# EAGLE board 13539_Simultaneous_RFID_Tag_Reader_panel_v10 (EAGLE 7.5.0), part 1 of 2
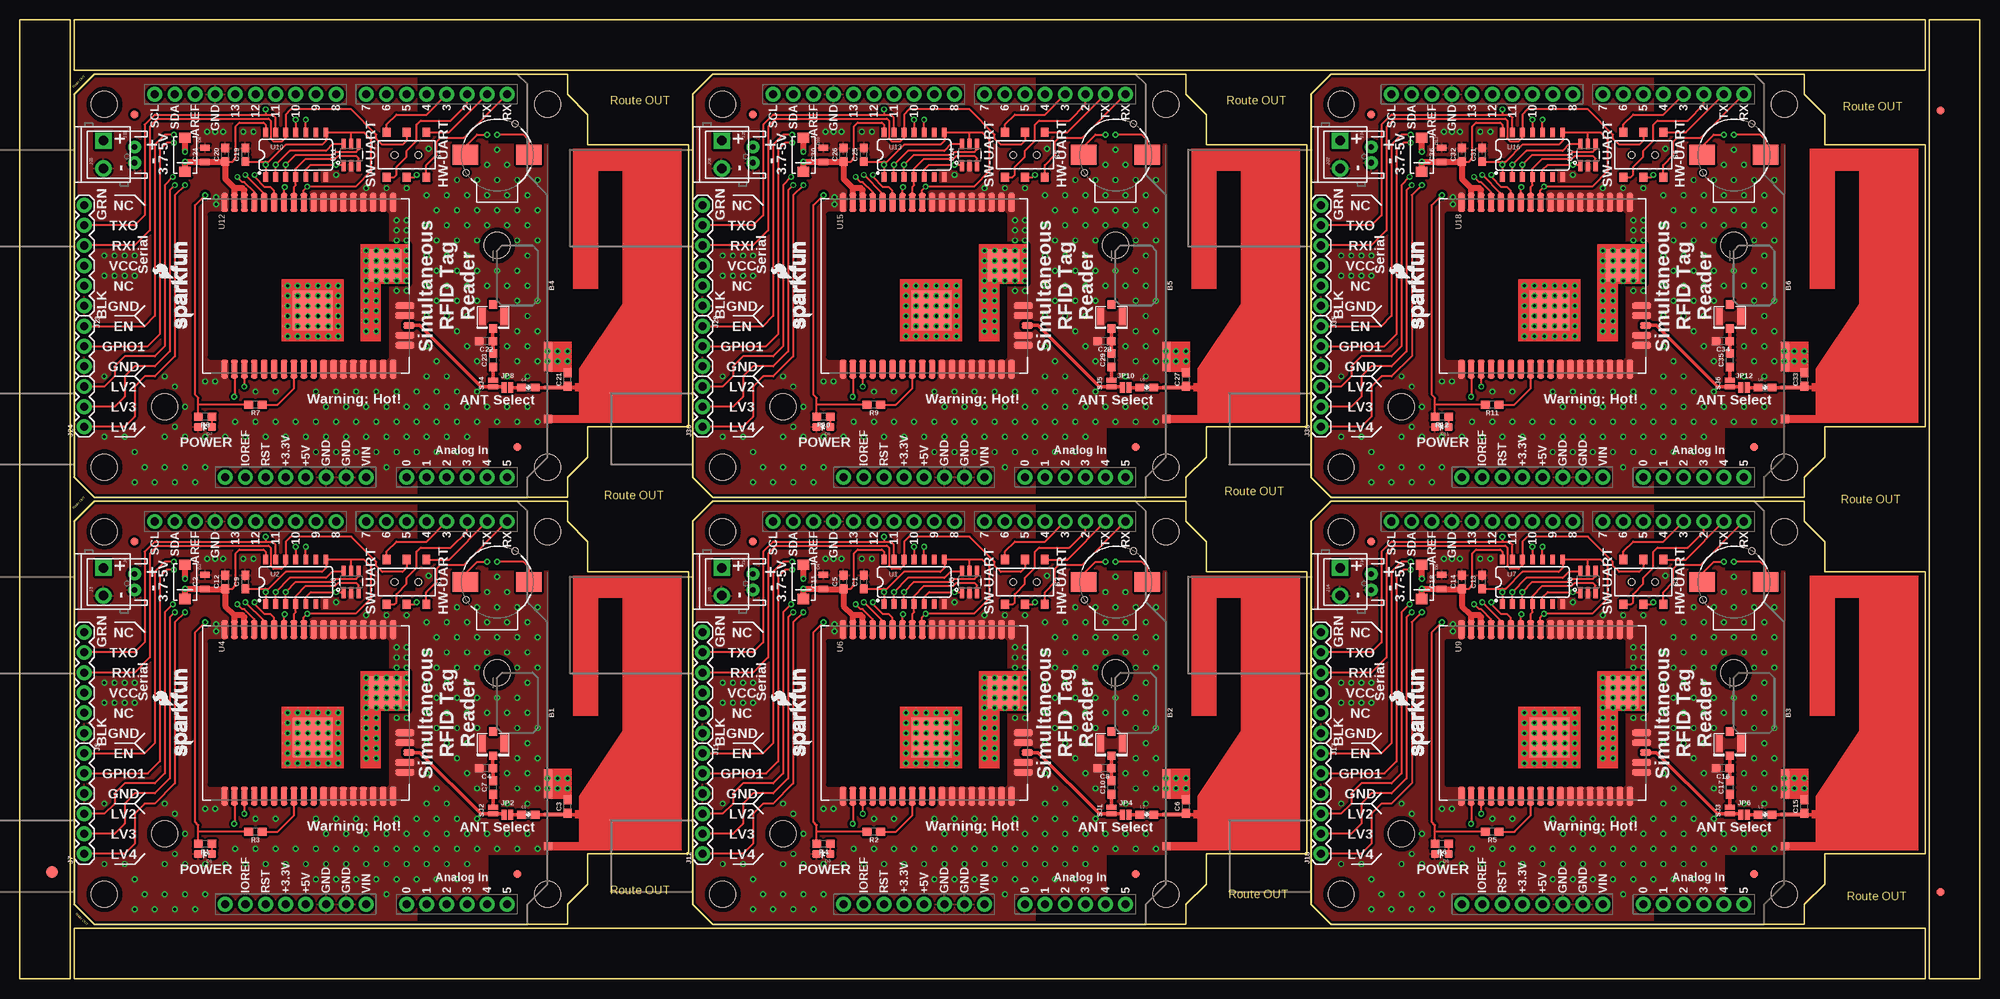
[diagram p0: board, top side]
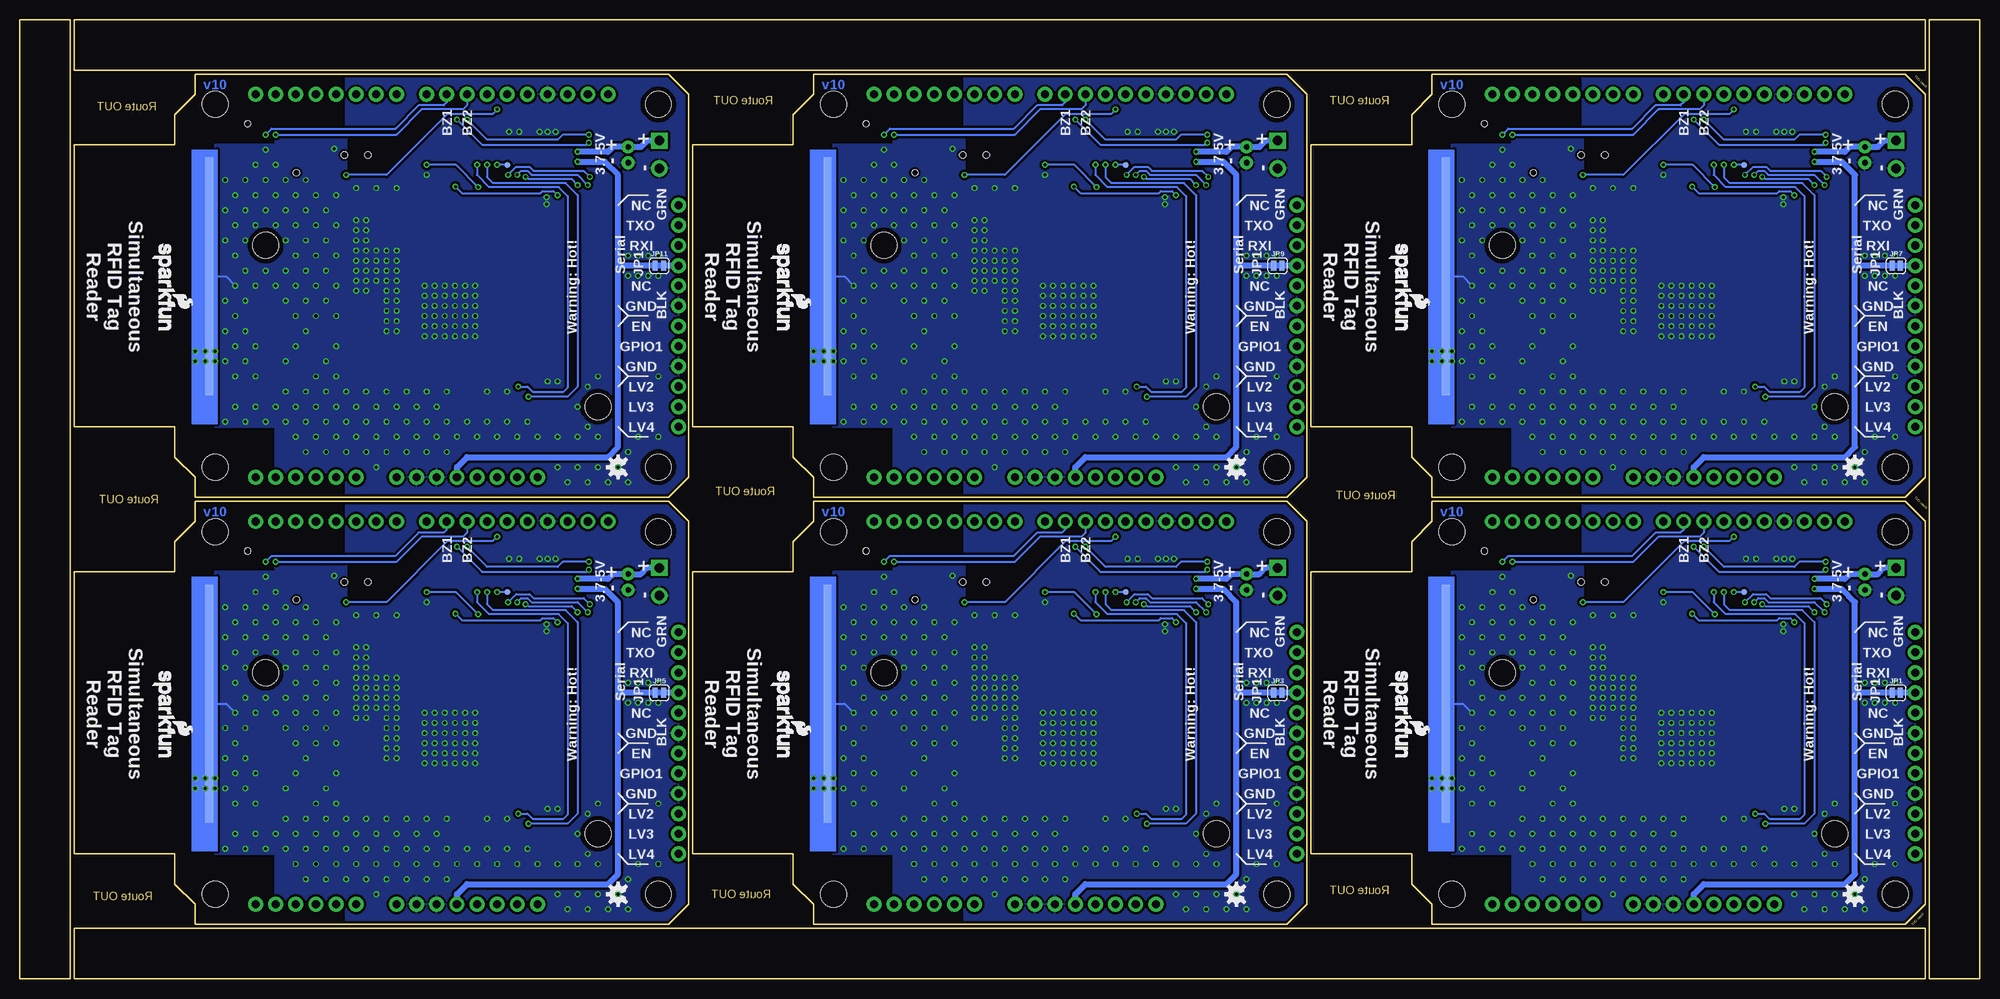
[diagram p1: board, bottom side, seen from below]

Size 247.14 x 120.9 mm. Coordinates in mm from the lower left corner, seen from the top.
Outline: 6.35,79.25 6.35,0 0,0 0,29.72
Outline: 0,27.18 0,120.9 6.35,120.9 6.35,76.71
Outline: 79.25,0 6.86,0 6.86,6.35 29.72,6.35
Outline: 27.18,6.35 240.28,6.35 240.28,0 76.71,0
Outline: 164.08,120.9 240.28,120.9 240.28,114.55 213.61,114.55
Outline: 216.15,114.55 6.86,114.55 6.86,120.9 166.62,120.9
Outline: 240.79,36.83 240.79,120.9 247.14,120.9 247.14,86.36
Outline: 247.14,88.9 247.14,0 240.79,0 240.79,39.37
Outline: 69.09,60.2 69.09,57.66 71.63,55.12 71.63,51.31 84.33,51.31 84.33,15.75 71.63,15.75 71.63,11.94 69.09,9.4 69.09,6.86 9.4,6.86 6.86,9.4 6.86,57.66 9.4,60.2 69.09,60.2
Outline: 147.07,60.2 147.07,57.66 149.61,55.12 149.61,51.31 162.31,51.31 162.31,15.75 149.61,15.75 149.61,11.94 147.07,9.4 147.07,6.86 87.38,6.86 84.84,9.4 84.84,57.66 87.38,60.2 147.07,60.2
Outline: 225.04,60.2 225.04,57.66 227.58,55.12 227.58,51.31 240.28,51.31 240.28,15.75 227.58,15.75 227.58,11.94 225.04,9.4 225.04,6.86 165.35,6.86 162.81,9.4 162.81,57.66 165.35,60.2 225.04,60.2
Outline: 69.09,114.05 69.09,111.51 71.63,108.97 71.63,105.16 84.33,105.16 84.33,69.6 71.63,69.6 71.63,65.79 69.09,63.25 69.09,60.71 9.4,60.71 6.86,63.25 6.86,111.51 9.4,114.05 69.09,114.05
Outline: 147.07,114.05 147.07,111.51 149.61,108.97 149.61,105.16 162.31,105.16 162.31,69.6 149.61,69.6 149.61,65.79 147.07,63.25 147.07,60.71 87.38,60.71 84.84,63.25 84.84,111.51 87.38,114.05 147.07,114.05
Outline: 225.04,114.05 225.04,111.51 227.58,108.97 227.58,105.16 240.28,105.16 240.28,69.6 227.58,69.6 227.58,65.79 225.04,63.25 225.04,60.71 165.35,60.71 162.81,63.25 162.81,111.51 165.35,114.05 225.04,114.05
Copper layers (1*16): Top 0.035mm / dielectric 1.5mm / Bottom 0.035mm
Design rules "SparkFun-2-layer-TIGHT": minimum track width 7mil, minimum drill 15mil, track to track 7mil, track to pad 7mil, pad to pad 7mil, via to via 7mil, smd to smd 7mil, copper to edge 7mil, drill to drill 7mil, minimum pad ring 7mil, minimum via ring 7mil, stop-mask expansion 4mil, vias tented up to drill 20mil, thermal gap 10mil
Net classes: 1 power: width 0.203 mm

## Footprints (pad centres in the part's own frame; a part is rotated, then mirrored left to right if it is on the bottom)
UNO_R3_SHIELD = drill 1.016 pad 1.88: 3.3V 24.13,-2.54; 5V 24.13,0; A0 24.13,12.7; A1 24.13,15.24; A2 24.13,17.78; A3 24.13,20.32; A4 24.13,22.86; A5 24.13,25.4; AREF -24.13,-13.97; D2 -24.13,20.32; D3 -24.13,17.78; D4 -24.13,15.24; D5 -24.13,12.7; D6 -24.13,10.16; D7 -24.13,7.62; D8 -24.13,3.81; D9 -24.13,1.27; D10 -24.13,-1.27; D11 -24.13,-3.81; D12 -24.13,-6.35; D13 -24.13,-8.89; GND@0 24.13,2.54; GND@1 24.13,5.08; GND@2 -24.13,-11.43; IOREF 24.13,-7.62; NC 24.13,-10.16; RES 24.13,-5.08; RX -24.13,25.4; SCL -24.13,-19.05; SDA -24.13,-16.51; TX -24.13,22.86; VIN 24.13,7.62
0603 = smd 1.1 x 1: 1 -0.85,0; 2 0.85,0
0805 = smd 0.8 x 1.2: 1 -0.9,0; 2 0.9,0
LED-0603 = smd 1 x 1: A 0,-0.877; C 0,0.877
SMA-DIODE = smd 1.27 x 1.47: A -2.15,0; C 2.15,0
915MHZ_ANTENNA_TRIMBLE = smd 0.44 x 3: ANT -0.006,-1.315 | smd 1.02 x 1: GND@1 -3.966,-0.315 | smd 3.677 x 1: GND@2 3.909,-0.315 | smd 30 x 1 bottom: GND@3 14,-1
FIDUCIAL-1.5X3 = smd 1.5 x 1.5: 1 0,0
FIDUCIAL-1X2 = smd 1 x 1: 1 0,0
1X06 = drill 1.016 pad 1.88: 1 0,0; 2 2.54,0; 3 5.08,0; 4 7.62,0; 5 10.16,0; 6 12.7,0
JST-2-PTH = drill 0.7 pad 1.6: 1 -1,0; 2 1,0
U.FL = smd 2.2 x 0.85: P$1 0,1.375; P$2 0,-1.375 | smd 1.05 x 1: P$3 1.525,0; P$4 -1.525,0
1X03 = drill 1.016 pad 1.88: 1 0,0; 2 2.54,0; 3 5.08,0
SCREWTERMINAL-3.5MM-2 = drill 1.2 pad 2.032 square: 1 0,0 | drill 1.2 pad 2.032: 2 3.5,0
SMT-JUMPER_2_NC_TRACE_SILK = smd 0.635 x 1.27: 1 -0.508,0; 2 0.508,0
SMT-JUMPER_2_NO_NO-SILK = smd 0.635 x 1.27: 1 -0.406,0; 2 0.406,0
SWITCH_DPDT_SMD_AYZ0202 = smd 1 x 1.15: 1 -2.5,2.825; 2 0,2.825; 3 2.5,2.825; 4 -2.5,-2.825; 5 0,-2.825; 6 2.5,-2.825 | hole 0.85: 1.5,0; -1.5,0
BUZZER-CCV = smd 3.2 x 2.5: + 4,0; - -4,0 | hole 0.8: -3.9,-2.25; 2.25,3.9
STAND-OFF = hole 3.302: 0,0
PAD.03X.03 = smd 0.762 x 0.762: P$1 0,0
SO14 = smd 0.6 x 1.2: 1 -3.81,-2.8; 2 -2.54,-2.8; 3 -1.27,-2.8; 4 0,-2.8; 5 1.27,-2.8; 6 2.54,-2.8; 7 3.81,-2.8; 8 3.81,2.8; 9 2.54,2.8; 10 1.27,2.8; 11 0,2.8; 12 -1.27,2.8; 13 -2.54,2.8; 14 -3.81,2.8
SOT-23-6 = smd 0.55 x 1.35: 1 -0.95,-1.375; 2 0,-1.375; 3 0.95,-1.375; 4 0.95,1.375; 5 0,1.375; 6 -0.95,1.375
NANO_MODULE = smd 2.4 x 0.85: 1 -10.5,11; 2 -10.5,9.75; 3 -10.5,8.5; 4 -10.5,7.25; 5 -10.5,6; 6 -10.5,4.75; 7 -10.5,3.5; 8 -10.5,2.25; 9 -10.5,1; 10 -10.5,-0.25; 11 -10.5,-1.5; 12 -10.5,-2.75; 13 -10.5,-4; 14 -10.5,-5.25; 15 -10.5,-6.5; 16 -10.5,-7.75; 17 -10.5,-9; 18 -10.5,-10.25; 19 10.5,-10.25; 20 10.5,-9; 21 10.5,-7.75; 22 10.5,-6.5; 23 10.5,-5.25; 24 10.5,-4; 25 10.5,-2.75; 26 10.5,-1.5; 27 10.5,-0.25; 28 10.5,1; 29 10.5,2.25; 30 10.5,3.5; 31 10.5,4.75; 32 10.5,6; 33 10.5,7.25; 34 10.5,8.5; 35 10.5,9.75; 36 10.5,11 | smd 0.85 x 2.4: 37 7.5,12.5; 38 6.25,12.5; 40 3.75,12.5; 41 2.5,12.5 | smd 0.85 x 1.4: 39 5,13 | smd 5 x 5: GND_PAD1 3.1,0.9 | smd 4 x 4: GND_PAD2 -2.6,10

## Placement (x,y rotation side)
B1  ARDUINO_UNO_SHIELD  [UNO_R3_SHIELD]  36.07,33.53 270 top
B2  ARDUINO_UNO_SHIELD  [UNO_R3_SHIELD]  114.05,33.53 270 top
B3  ARDUINO_UNO_SHIELD  [UNO_R3_SHIELD]  192.02,33.53 270 top
B4  ARDUINO_UNO_SHIELD  [UNO_R3_SHIELD]  36.07,87.38 270 top
B5  ARDUINO_UNO_SHIELD  [UNO_R3_SHIELD]  114.05,87.38 270 top
B6  ARDUINO_UNO_SHIELD  [UNO_R3_SHIELD]  192.02,87.38 270 top
C1  0.1uF  [0603]  106.43,50.04 90 top
C2  10uF  [0805]  23.37,50.04 90 top
C3  DNP  [0603]  69.09,21.72 90 top
C4  TBD  [0603]  58.8,26.54 180 top
C5  0.1uF  [0603]  103.89,50.04 90 top
C6  DNP  [0603]  147.07,21.72 90 top
C7  TBD  [0603]  59.69,24.13 90 top
C8  TBD  [0603]  136.78,26.54 180 top
C9  0.1uF  [0603]  28.45,50.04 90 top
C10  TBD  [0603]  137.67,24.13 90 top
C11  10uF  [0805]  101.35,50.04 90 top
C12  0.1uF  [0603]  25.91,50.04 90 top
C13  0.1uF  [0603]  184.4,50.04 90 top
C14  0.1uF  [0603]  181.86,50.04 90 top
C15  DNP  [0603]  225.04,21.72 90 top
C16  TBD  [0603]  214.76,26.54 180 top
C17  TBD  [0603]  215.65,24.13 90 top
C18  10uF  [0805]  179.32,50.04 90 top
C19  0.1uF  [0603]  28.45,103.89 90 top
C20  0.1uF  [0603]  25.91,103.89 90 top
C21  DNP  [0603]  69.09,75.56 90 top
C22  TBD  [0603]  58.8,80.39 180 top
C23  TBD  [0603]  59.69,77.98 90 top
C24  10uF  [0805]  23.37,103.89 90 top
C25  0.1uF  [0603]  106.43,103.89 90 top
C26  0.1uF  [0603]  103.89,103.89 90 top
C27  DNP  [0603]  147.07,75.56 90 top
C28  TBD  [0603]  136.78,80.39 180 top
C29  TBD  [0603]  137.67,77.98 90 top
C30  10uF  [0805]  101.35,103.89 90 top
C31  0.1uF  [0603]  184.4,103.89 90 top
C32  0.1uF  [0603]  181.86,103.89 90 top
C33  DNP  [0603]  225.04,75.56 90 top
C34  TBD  [0603]  214.76,80.39 180 top
C35  TBD  [0603]  215.65,77.98 90 top
C36  10uF  [0805]  179.32,103.89 90 top
D1  RED  [LED-0603]  23.37,15.75 90 top
D2  B340A  [SMA-DIODE]  20.83,50.04 270 top
D3  RED  [LED-0603]  101.35,15.75 90 top
D4  B340A  [SMA-DIODE]  98.81,50.04 270 top
D5  RED  [LED-0603]  179.32,15.75 90 top
D6  B340A  [SMA-DIODE]  176.78,50.04 270 top
D7  RED  [LED-0603]  23.37,69.6 90 top
D8  B340A  [SMA-DIODE]  20.83,103.89 270 top
D9  RED  [LED-0603]  101.35,69.6 90 top
D10  B340A  [SMA-DIODE]  98.81,103.89 270 top
D11  RED  [LED-0603]  179.32,69.6 90 top
D12  B340A  [SMA-DIODE]  176.78,103.89 270 top
E1  Trace Antenna  [915MHZ_ANTENNA_TRIMBLE]  66.29,20.7 90 top
E2  Trace Antenna  [915MHZ_ANTENNA_TRIMBLE]  144.27,20.7 90 top
E3  Trace Antenna  [915MHZ_ANTENNA_TRIMBLE]  222.25,20.7 90 top
E4  Trace Antenna  [915MHZ_ANTENNA_TRIMBLE]  66.29,74.55 90 top
E5  Trace Antenna  [915MHZ_ANTENNA_TRIMBLE]  144.27,74.55 90 top
E6  Trace Antenna  [915MHZ_ANTENNA_TRIMBLE]  222.25,74.55 90 top
E$1  [FIDUCIAL-1.5X3]  4.06,13.46 0 top
E$7  [FIDUCIAL-1X2]  242.19,109.47 180 top
E$8  [FIDUCIAL-1X2]  242.19,10.92 0 top
FID1  FIDUCIAL1X2  [FIDUCIAL-1X2]  14.48,55.12 270 top
FID2  FIDUCIAL1X2  [FIDUCIAL-1X2]  62.74,13.21 90 top
FID3  FIDUCIAL1X2  [FIDUCIAL-1X2]  92.46,55.12 270 top
FID4  FIDUCIAL1X2  [FIDUCIAL-1X2]  140.72,13.21 90 top
FID5  FIDUCIAL1X2  [FIDUCIAL-1X2]  170.43,55.12 270 top
FID6  FIDUCIAL1X2  [FIDUCIAL-1X2]  218.69,13.21 90 top
FID7  FIDUCIAL1X2  [FIDUCIAL-1X2]  14.48,108.97 270 top
FID8  FIDUCIAL1X2  [FIDUCIAL-1X2]  62.74,67.06 90 top
FID9  FIDUCIAL1X2  [FIDUCIAL-1X2]  92.46,108.97 270 top
FID10  FIDUCIAL1X2  [FIDUCIAL-1X2]  140.72,67.06 90 top
FID11  FIDUCIAL1X2  [FIDUCIAL-1X2]  170.43,108.97 270 top
FID12  FIDUCIAL1X2  [FIDUCIAL-1X2]  218.69,67.06 90 top
J1  FTDI  [1X06]  86.11,30.99 90 top
J2  FTDI  [1X06]  8.13,30.99 90 top
J3  JST  [JST-2-PTH]  14.48,50.04 90 top
J4  U.FL  [U.FL]  59.69,29.65 270 top
J5  Extra  [1X03]  8.13,28.45 270 top
J6  Screw Terminal  [SCREWTERMINAL-3.5MM-2]  10.54,51.82 270 top
J7  GPIOs  [1X03]  8.13,15.75 90 top
J8  JST  [JST-2-PTH]  92.46,50.04 90 top
J9  U.FL  [U.FL]  137.67,29.65 270 top
J10  Screw Terminal  [SCREWTERMINAL-3.5MM-2]  88.52,51.82 270 top
J11  Extra  [1X03]  86.11,28.45 270 top
J12  GPIOs  [1X03]  86.11,15.75 90 top
J13  FTDI  [1X06]  164.08,30.99 90 top
J14  JST  [JST-2-PTH]  170.43,50.04 90 top
J15  U.FL  [U.FL]  215.65,29.65 270 top
J16  Screw Terminal  [SCREWTERMINAL-3.5MM-2]  166.5,51.82 270 top
J17  Extra  [1X03]  164.08,28.45 270 top
J18  GPIOs  [1X03]  164.08,15.75 90 top
J19  FTDI  [1X06]  8.13,84.84 90 top
J20  JST  [JST-2-PTH]  14.48,103.89 90 top
J21  U.FL  [U.FL]  59.69,83.5 270 top
J22  Screw Terminal  [SCREWTERMINAL-3.5MM-2]  10.54,105.66 270 top
J23  Extra  [1X03]  8.13,82.3 270 top
J24  GPIOs  [1X03]  8.13,69.6 90 top
J25  FTDI  [1X06]  86.11,84.84 90 top
J26  JST  [JST-2-PTH]  92.46,103.89 90 top
J27  U.FL  [U.FL]  137.67,83.5 270 top
J28  Screw Terminal  [SCREWTERMINAL-3.5MM-2]  88.52,105.66 270 top
J29  Extra  [1X03]  86.11,82.3 270 top
J30  GPIOs  [1X03]  86.11,69.6 90 top
J31  FTDI  [1X06]  164.08,84.84 90 top
J32  JST  [JST-2-PTH]  170.43,103.89 90 top
J33  U.FL  [U.FL]  215.65,83.5 270 top
J34  Screw Terminal  [SCREWTERMINAL-3.5MM-2]  166.5,105.66 270 top
J35  Extra  [1X03]  164.08,82.3 270 top
J36  GPIOs  [1X03]  164.08,69.6 90 top
JP1  [SMT-JUMPER_2_NC_TRACE_SILK]  10.54,36.07 0 bottom
JP2  SJ1  [SMT-JUMPER_2_NO_NO-SILK]  61.47,20.7 0 top
JP3  [SMT-JUMPER_2_NC_TRACE_SILK]  88.52,36.07 0 bottom
JP4  SJ1  [SMT-JUMPER_2_NO_NO-SILK]  139.45,20.7 0 top
JP5  [SMT-JUMPER_2_NC_TRACE_SILK]  166.5,36.07 0 bottom
JP6  SJ1  [SMT-JUMPER_2_NO_NO-SILK]  217.42,20.7 0 top
JP7  [SMT-JUMPER_2_NC_TRACE_SILK]  10.54,89.92 0 bottom
JP8  SJ1  [SMT-JUMPER_2_NO_NO-SILK]  61.47,74.55 0 top
JP9  [SMT-JUMPER_2_NC_TRACE_SILK]  88.52,89.92 0 bottom
JP10  SJ1  [SMT-JUMPER_2_NO_NO-SILK]  139.45,74.55 0 top
JP11  [SMT-JUMPER_2_NC_TRACE_SILK]  166.5,89.92 0 bottom
JP12  SJ1  [SMT-JUMPER_2_NO_NO-SILK]  217.42,74.55 0 top
L1  3.9nH  [0603]  64.14,20.7 0 top
L2  3.9nH  [0603]  142.11,20.7 0 top
L3  3.9nH  [0603]  220.09,20.7 0 top
L4  3.9nH  [0603]  64.14,74.55 0 top
L5  3.9nH  [0603]  142.11,74.55 0 top
L6  3.9nH  [0603]  220.09,74.55 0 top
LOGO1  SFE_LOGO_NAME_FLAME.1_INCH  [SFE_LOGO_NAME_FLAME_.1]  21.97,27.69 90 top
LOGO2  OSHW-LOGOS  [OSHW-LOGO-S]  15.75,10.67 90 bottom
LOGO3  SFE_LOGO_NAME_FLAME.1_INCH  [SFE_LOGO_NAME_FLAME_.1]  74.55,39.24 270 bottom
LOGO4  SFE_LOGO_NAME_FLAME.1_INCH  [SFE_LOGO_NAME_FLAME_.1]  99.95,27.69 90 top
LOGO5  OSHW-LOGOS  [OSHW-LOGO-S]  93.73,10.67 90 bottom
LOGO6  SFE_LOGO_NAME_FLAME.1_INCH  [SFE_LOGO_NAME_FLAME_.1]  152.53,39.24 270 bottom
LOGO7  SFE_LOGO_NAME_FLAME.1_INCH  [SFE_LOGO_NAME_FLAME_.1]  177.93,27.69 90 top
LOGO8  OSHW-LOGOS  [OSHW-LOGO-S]  171.7,10.67 90 bottom
LOGO9  SFE_LOGO_NAME_FLAME.1_INCH  [SFE_LOGO_NAME_FLAME_.1]  230.5,39.24 270 bottom
LOGO10  SFE_LOGO_NAME_FLAME.1_INCH  [SFE_LOGO_NAME_FLAME_.1]  21.97,81.53 90 top
LOGO11  OSHW-LOGOS  [OSHW-LOGO-S]  15.75,64.52 90 bottom
LOGO12  SFE_LOGO_NAME_FLAME.1_INCH  [SFE_LOGO_NAME_FLAME_.1]  74.55,93.09 270 bottom
LOGO13  SFE_LOGO_NAME_FLAME.1_INCH  [SFE_LOGO_NAME_FLAME_.1]  99.95,81.53 90 top
LOGO14  OSHW-LOGOS  [OSHW-LOGO-S]  93.73,64.52 90 bottom
LOGO15  SFE_LOGO_NAME_FLAME.1_INCH  [SFE_LOGO_NAME_FLAME_.1]  152.53,93.09 270 bottom
LOGO16  SFE_LOGO_NAME_FLAME.1_INCH  [SFE_LOGO_NAME_FLAME_.1]  177.93,81.53 90 top
LOGO17  OSHW-LOGOS  [OSHW-LOGO-S]  171.7,64.52 90 bottom
LOGO18  SFE_LOGO_NAME_FLAME.1_INCH  [SFE_LOGO_NAME_FLAME_.1]  230.5,93.09 270 bottom
R1  1k  [0603]  23.37,17.02 180 top
R2  1k  [0603]  107.7,18.54 180 top
R3  1k  [0603]  29.72,18.54 180 top
R4  1k  [0603]  101.35,17.02 180 top
R5  1k  [0603]  185.67,18.54 180 top
R6  1k  [0603]  179.32,17.02 180 top
R7  1k  [0603]  29.72,72.39 180 top
R8  1k  [0603]  23.37,70.87 180 top
R9  1k  [0603]  107.7,72.39 180 top
R10  1k  [0603]  101.35,70.87 180 top
R11  1k  [0603]  185.67,72.39 180 top
R12  1k  [0603]  179.32,70.87 180 top
S1  Serial Select  [SWITCH_DPDT_SMD_AYZ0202]  48.77,50.04 180 top
S2  Serial Select  [SWITCH_DPDT_SMD_AYZ0202]  126.75,50.04 180 top
S3  Serial Select  [SWITCH_DPDT_SMD_AYZ0202]  204.72,50.04 180 top
S4  Serial Select  [SWITCH_DPDT_SMD_AYZ0202]  48.77,103.89 180 top
S5  Serial Select  [SWITCH_DPDT_SMD_AYZ0202]  126.75,103.89 180 top
S6  Serial Select  [SWITCH_DPDT_SMD_AYZ0202]  204.72,103.89 180 top
SG1  Buzzer  [BUZZER-CCV]  60.2,50.04 0 top
SG2  Buzzer  [BUZZER-CCV]  138.18,50.04 0 top
SG3  Buzzer  [BUZZER-CCV]  216.15,50.04 0 top
SG4  Buzzer  [BUZZER-CCV]  60.2,103.89 0 top
SG5  Buzzer  [BUZZER-CCV]  138.18,103.89 0 top
SG6  Buzzer  [BUZZER-CCV]  216.15,103.89 0 top
SJ1  [SMT-JUMPER_2_NO_NO-SILK]  137.67,21.21 90 top
SJ2  [SMT-JUMPER_2_NO_NO-SILK]  59.69,21.21 90 top
SJ3  [SMT-JUMPER_2_NO_NO-SILK]  215.65,21.21 90 top
SJ4  [SMT-JUMPER_2_NO_NO-SILK]  59.69,75.06 90 top
SJ5  [SMT-JUMPER_2_NO_NO-SILK]  137.67,75.06 90 top
SJ6  [SMT-JUMPER_2_NO_NO-SILK]  215.65,75.06 90 top
STANDOFF1  STAND-OFF  [STAND-OFF]  10.67,56.39 90 top
STANDOFF2  STAND-OFF  [STAND-OFF]  66.55,56.39 270 top
STANDOFF3  STAND-OFF  [STAND-OFF]  66.55,10.67 90 top
STANDOFF4  STAND-OFF  [STAND-OFF]  10.67,10.67 90 top
STANDOFF5  STAND-OFF  [STAND-OFF]  88.65,10.67 90 top
STANDOFF6  STAND-OFF  [STAND-OFF]  144.53,10.67 90 top
STANDOFF7  STAND-OFF  [STAND-OFF]  18.29,18.29 0 top
STANDOFF8  STAND-OFF  [STAND-OFF]  60.2,38.61 0 top
STANDOFF9  STAND-OFF  [STAND-OFF]  144.53,56.39 270 top
STANDOFF10  STAND-OFF  [STAND-OFF]  88.65,56.39 90 top
STANDOFF11  STAND-OFF  [STAND-OFF]  96.27,18.29 0 top
STANDOFF12  STAND-OFF  [STAND-OFF]  138.18,38.61 0 top
STANDOFF13  STAND-OFF  [STAND-OFF]  166.62,10.67 90 top
STANDOFF14  STAND-OFF  [STAND-OFF]  222.5,10.67 90 top
STANDOFF15  STAND-OFF  [STAND-OFF]  222.5,56.39 270 top
STANDOFF16  STAND-OFF  [STAND-OFF]  166.62,56.39 90 top
STANDOFF17  STAND-OFF  [STAND-OFF]  174.24,18.29 0 top
STANDOFF18  STAND-OFF  [STAND-OFF]  216.15,38.61 0 top
STANDOFF19  STAND-OFF  [STAND-OFF]  10.67,64.52 90 top
STANDOFF20  STAND-OFF  [STAND-OFF]  66.55,64.52 90 top
STANDOFF21  STAND-OFF  [STAND-OFF]  66.55,110.24 270 top
STANDOFF22  STAND-OFF  [STAND-OFF]  10.67,110.24 90 top
STANDOFF23  STAND-OFF  [STAND-OFF]  18.29,72.14 0 top
STANDOFF24  STAND-OFF  [STAND-OFF]  60.2,92.46 0 top
STANDOFF25  STAND-OFF  [STAND-OFF]  88.65,64.52 90 top
STANDOFF26  STAND-OFF  [STAND-OFF]  144.53,64.52 90 top
STANDOFF27  STAND-OFF  [STAND-OFF]  144.53,110.24 270 top
STANDOFF28  STAND-OFF  [STAND-OFF]  88.65,110.24 90 top
STANDOFF29  STAND-OFF  [STAND-OFF]  96.27,72.14 0 top
STANDOFF30  STAND-OFF  [STAND-OFF]  138.18,92.46 0 top
STANDOFF31  STAND-OFF  [STAND-OFF]  166.62,64.52 90 top
STANDOFF32  STAND-OFF  [STAND-OFF]  222.5,64.52 90 top
STANDOFF33  STAND-OFF  [STAND-OFF]  222.5,110.24 270 top
STANDOFF34  STAND-OFF  [STAND-OFF]  166.62,110.24 90 top
STANDOFF35  STAND-OFF  [STAND-OFF]  174.24,72.14 0 top
STANDOFF36  STAND-OFF  [STAND-OFF]  216.15,92.46 0 top
TP1  [PAD.03X.03]  29.72,48.77 0 bottom
TP2  [PAD.03X.03]  107.7,48.77 0 bottom
TP3  [PAD.03X.03]  185.67,48.77 0 bottom
TP4  [PAD.03X.03]  29.72,102.62 0 bottom
TP5  [PAD.03X.03]  107.7,102.62 0 bottom
TP6  [PAD.03X.03]  185.67,102.62 0 bottom
U1  TXB0104  [SO14]  112.78,50.04 0 top
U2  TXB0104  [SO14]  34.8,50.04 0 top
U3  ESD Diode  [SOT-23-6]  41.78,50.04 0 top
U4  Nano  [NANO_MODULE]  36.07,33.53 270 top
U5  ESD Diode  [SOT-23-6]  119.76,50.04 0 top
U6  Nano  [NANO_MODULE]  114.05,33.53 270 top
U7  TXB0104  [SO14]  190.75,50.04 0 top
U8  ESD Diode  [SOT-23-6]  197.74,50.04 0 top
U9  Nano  [NANO_MODULE]  192.02,33.53 270 top
U10  TXB0104  [SO14]  34.8,103.89 0 top
U11  ESD Diode  [SOT-23-6]  41.78,103.89 0 top
U12  Nano  [NANO_MODULE]  36.07,87.38 270 top
U13  TXB0104  [SO14]  112.78,103.89 0 top
U14  ESD Diode  [SOT-23-6]  119.76,103.89 0 top
U15  Nano  [NANO_MODULE]  114.05,87.38 270 top
U16  TXB0104  [SO14]  190.75,103.89 0 top
U17  ESD Diode  [SOT-23-6]  197.74,103.89 0 top
U18  Nano  [NANO_MODULE]  192.02,87.38 270 top

## Library data of the parts
B1-B6 = SparkFun-Boards
C1 C5 C9 C12-C14 C19 C20 C25 C26 C31 C32 = SparkFun-Capacitors; PROD_ID: CAP-00810
C2 C11 C18 C24 C30 C36 = SparkFun-Capacitors; PROD_ID: CAP-11330
C3 C4 C6-C8 C10 C15-C17 C21-C23 C27-C29 C33-C35 = SparkFun-Capacitors; PROD_ID: CAP-07879
D1 D3 D5 D7 D9 D11 = SparkFun-LED; PROD_ID: DIO-00819
D2 D4 D6 D8 D10 D12 = SparkFun-DiscreteSemi; PROD_ID: DIO-09886
E1-E6 = ThingMagic_Module
E$1 = SparkFun-Retired
E$7 E$8 FID1-FID12 LOGO1-LOGO18 = SparkFun-Aesthetics
J1 J2 J13 J19 J25 J31 = SparkFun-Connectors; PROD_ID: CONN-08437
J3 J8 J14 J20 J26 J32 = SparkFun-Connectors; PROD_ID: CONN-09863; SKU: PRT-09914
J4 J9 J15 J21 J27 J33 = SparkFun-Connectors; PROD_ID: CONN-09193
J5 J7 J11 J12 J17 J18 J23 J24 J29 J30 J35 J36 TP1-TP6 = SparkFun-Connectors
J6 J10 J16 J22 J28 J34 = SparkFun-Connectors; PROD_ID: CONN-08399
JP1-JP12 SJ1-SJ6 = SparkFun-Jumpers
L1-L6 = ThingMagic_Module; PROD_ID: NDUC-08761
R1-R12 = SparkFun-Resistors; PROD_ID: RES-07856
S1-S6 = SparkFun-Switches; PROD_ID: SWCH-08179; SF_SKU: COM-00597
SG1-SG6 = ThingMagic_Module; PROD_ID: COMP-08568
STANDOFF1-STANDOFF36 = SparkFun-Electromechanical
U1 U2 U7 U10 U13 U16 = SparkFun-IC-Comms; PROD_ID: IC-11329
U3 U5 U8 U11 U14 U17 = UHF_RFID_Nano_Module; PROD_ID: IC-13538
U4 U6 U9 U12 U15 U18 = ThingMagic_Module; PROD_ID: IC-13540

## Nets
3.3V: C9.1 R1.2 R3.2 TP1.P$1 U2.1 U2.8 U3.5 U4.10
3.3V1: C1.1 R2.2 R4.2 TP2.P$1 U1.1 U1.8 U5.5 U6.10
3.3V2: C13.1 R5.2 R6.2 TP3.P$1 U7.1 U7.8 U8.5 U9.10
3.3V3: C19.1 R7.2 R8.2 TP4.P$1 U10.1 U10.8 U11.5 U12.10
3.3V4: C25.1 R9.2 R10.2 TP5.P$1 U13.1 U13.8 U14.5 U15.10
3.3V5: C31.1 R11.2 R12.2 TP6.P$1 U16.1 U16.8 U17.5 U18.10
ANT1: JP4.1 SJ1.1 U6.39
ANT2: JP6.1 SJ3.1 U9.39
ANT3: JP2.1 SJ2.1 U4.39
ANT4: JP8.1 SJ4.1 U12.39
ANT5: JP10.1 SJ5.1 U15.39
ANT6: JP12.1 SJ6.1 U18.39
ENABLE: J5.1 U2.11
ENABLE1: J11.1 U1.11
ENABLE2: J17.1 U7.11
ENABLE3: J23.1 U10.11
ENABLE4: J29.1 U13.11
ENABLE5: J35.1 U16.11
ENABLE-LV: U2.4 U3.3 U4.11
ENABLE-LV1: U1.4 U5.3 U6.11
ENABLE-LV2: U7.4 U8.3 U9.11
ENABLE-LV3: U10.4 U11.3 U12.11
ENABLE-LV4: U13.4 U14.3 U15.11
ENABLE-LV5: U16.4 U17.3 U18.11
GND [power]: B1.GND@0 B1.GND@1 B1.GND@2 C2.2 C3.2 C4.2 C9.2 C12.2 D1.C E1.GND@1 E1.GND@2 E1.GND@3 J2.1 J3.1 J4.P$1 J4.P$2 J5.3 J6.2 U2.7 U3.2 U4.1 U4.2 U4.3 U4.4 U4.5 U4.6 U4.7 U4.8 U4.9 U4.18 U4.19 U4.29 U4.30 U4.31 U4.32 U4.33 U4.34 U4.35 U4.36 U4.37 U4.38 U4.40 U4.41 U4.GND_PAD2
GND1 [power]: B2.GND@0 B2.GND@1 B2.GND@2 C1.2 C5.2 C6.2 C8.2 C11.2 D3.C E2.GND@1 E2.GND@2 E2.GND@3 J1.1 J8.1 J9.P$1 J9.P$2 J10.2 J11.3 U1.7 U5.2 U6.1 U6.2 U6.3 U6.4 U6.5 U6.6 U6.7 U6.8 U6.9 U6.18 U6.19 U6.29 U6.30 U6.31 U6.32 U6.33 U6.34 U6.35 U6.36 U6.37 U6.38 U6.40 U6.41 U6.GND_PAD2
GND2 [power]: B3.GND@0 B3.GND@1 B3.GND@2 C13.2 C14.2 C15.2 C16.2 C18.2 D5.C E3.GND@1 E3.GND@2 E3.GND@3 J13.1 J14.1 J15.P$1 J15.P$2 J16.2 J17.3 U7.7 U8.2 U9.1 U9.2 U9.3 U9.4 U9.5 U9.6 U9.7 U9.8 U9.9 U9.18 U9.19 U9.29 U9.30 U9.31 U9.32 U9.33 U9.34 U9.35 U9.36 U9.37 U9.38 U9.40 U9.41 U9.GND_PAD2
GND3 [power]: B4.GND@0 B4.GND@1 B4.GND@2 C19.2 C20.2 C21.2 C22.2 C24.2 D7.C E4.GND@1 E4.GND@2 E4.GND@3 J19.1 J20.1 J21.P$1 J21.P$2 J22.2 J23.3 U10.7 U11.2 U12.1 U12.2 U12.3 U12.4 U12.5 U12.6 U12.7 U12.8 U12.9 U12.18 U12.19 U12.29 U12.30 U12.31 U12.32 U12.33 U12.34 U12.35 U12.36 U12.37 U12.38 U12.40 U12.41 U12.GND_PAD2
GND4 [power]: B5.GND@0 B5.GND@1 B5.GND@2 C25.2 C26.2 C27.2 C28.2 C30.2 D9.C E5.GND@1 E5.GND@2 E5.GND@3 J25.1 J26.1 J27.P$1 J27.P$2 J28.2 J29.3 U13.7 U14.2 U15.1 U15.2 U15.3 U15.4 U15.5 U15.6 U15.7 U15.8 U15.9 U15.18 U15.19 U15.29 U15.30 U15.31 U15.32 U15.33 U15.34 U15.35 U15.36 U15.37 U15.38 U15.40 U15.41 U15.GND_PAD2
GND5 [power]: B6.GND@0 B6.GND@1 B6.GND@2 C31.2 C32.2 C33.2 C34.2 C36.2 D11.C E6.GND@1 E6.GND@2 E6.GND@3 J31.1 J32.1 J33.P$1 J33.P$2 J34.2 J35.3 U16.7 U17.2 U18.1 U18.2 U18.3 U18.4 U18.5 U18.6 U18.7 U18.8 U18.9 U18.18 U18.19 U18.29 U18.30 U18.31 U18.32 U18.33 U18.34 U18.35 U18.36 U18.37 U18.38 U18.40 U18.41 U18.GND_PAD2
GPIO1: J5.2 U2.10
GPIO1-LV: U2.5 U3.1 U4.12
GPIO1-LV1: U1.5 U5.1 U6.12
GPIO1-LV2: U7.5 U8.1 U9.12
GPIO1-LV3: U10.5 U11.1 U12.12
GPIO1-LV4: U13.5 U14.1 U15.12
GPIO1-LV5: U16.5 U17.1 U18.12
GPIO2: J11.2 U1.10
GPIO2-LV: J7.3 U4.13
GPIO2-LV1: J12.3 U6.13
GPIO2-LV2: J18.3 U9.13
GPIO2-LV3: J24.3 U12.13
GPIO2-LV4: J30.3 U15.13
GPIO2-LV5: J36.3 U18.13
GPIO3: J17.2 U7.10
GPIO3-LV: J7.2 U4.14
GPIO3-LV1: J12.2 U6.14
GPIO3-LV2: J18.2 U9.14
GPIO3-LV3: J24.2 U12.14
GPIO3-LV4: J30.2 U15.14
GPIO3-LV5: J36.2 U18.14
GPIO4: J23.2 U10.10
GPIO4-LV: J7.1 U4.15
GPIO4-LV1: J12.1 U6.15
GPIO4-LV2: J18.1 U9.15
GPIO4-LV3: J24.1 U12.15
GPIO4-LV4: J30.1 U15.15
GPIO4-LV5: J36.1 U18.15
GPIO5: J29.2 U13.10
GPIO6: J35.2 U16.10
N$1: C3.1 E1.ANT L1.2
N$2: JP2.2 L1.1
N$3: C7.1 SJ2.2
N$4: R3.1 U4.26
N$5: C4.1 C7.2 J4.P$3
N$6: D1.A R1.1
N$7: J2.3 JP1.2
N$8: B1.RX S1.1
N$9: B1.TX S1.4
N$11: B1.D9 SG1.+
N$12: D2.A J3.2 J6.1
N$13: B1.D10 SG1.-
N$14: R2.1 U6.26
N$15: B2.RX S2.1
N$16: B2.TX S2.4
N$17: C6.1 E2.ANT L2.2
N$18: JP4.2 L2.1
N$19: C10.1 SJ1.2
N$20: C8.1 C10.2 J9.P$3
N$21: D3.A R4.1
N$22: J1.3 JP3.2
N$24: D4.A J8.2 J10.1
N$25: B2.D9 SG2.+
N$26: B2.D10 SG2.-
N$27: R5.1 U9.26
N$28: B3.RX S3.1
N$29: B3.TX S3.4
N$31: C15.1 E3.ANT L3.2
N$32: JP6.2 L3.1
N$33: C17.1 SJ3.2
N$34: C16.1 C17.2 J15.P$3
N$35: D5.A R6.1
N$36: J13.3 JP5.2
N$38: D6.A J14.2 J16.1
N$39: B3.D9 SG3.+
N$40: B3.D10 SG3.-
N$41: R7.1 U12.26
N$42: B4.RX S4.1
N$43: B4.TX S4.4
N$44: C21.1 E4.ANT L4.2
N$45: JP8.2 L4.1
N$46: C23.1 SJ4.2
N$47: C22.1 C23.2 J21.P$3
N$48: D7.A R8.1
N$49: J19.3 JP7.2
N$51: D8.A J20.2 J22.1
N$52: B4.D9 SG4.+
N$53: B4.D10 SG4.-
N$54: R9.1 U15.26
N$55: B5.RX S5.1
N$56: B5.TX S5.4
N$57: C27.1 E5.ANT L5.2
N$58: JP10.2 L5.1
N$59: C29.1 SJ5.2
N$60: C28.1 C29.2 J27.P$3
N$61: D9.A R10.1
N$62: J25.3 JP9.2
N$64: D10.A J26.2 J28.1
N$65: B5.D9 SG5.+
N$66: B5.D10 SG5.-
N$67: R11.1 U18.26
N$68: B6.RX S6.1
N$69: B6.TX S6.4
N$70: C33.1 E6.ANT L6.2
N$71: JP12.2 L6.1
N$72: C35.1 SJ6.2
N$73: C34.1 C35.2 J33.P$3
N$74: D11.A R12.1
N$75: J31.3 JP11.2
N$77: D12.A J32.2 J34.1
N$78: B6.D9 SG6.+
N$79: B6.D10 SG6.-
RXI: J2.4 S1.5 U2.12
RXI1: J1.4 S2.5 U1.12
RXI2: J13.4 S3.5 U7.12
RXI3: J19.4 S4.5 U10.12
RXI4: J25.4 S5.5 U13.12
RXI5: J31.4 S6.5 U16.12
RXI-LV: U2.3 U3.4 U4.21
RXI-LV1: U1.3 U5.4 U6.21
RXI-LV2: U7.3 U8.4 U9.21
RXI-LV3: U10.3 U11.4 U12.21
RXI-LV4: U13.3 U14.4 U15.21
RXI-LV5: U16.3 U17.4 U18.21
SOFT-RX: B1.D2 S1.3
SOFT-RX1: B2.D2 S2.3
SOFT-RX2: B3.D2 S3.3
SOFT-RX3: B4.D2 S4.3
SOFT-RX4: B5.D2 S5.3
SOFT-RX5: B6.D2 S6.3
SOFT-TX: B1.D3 S1.6
SOFT-TX1: B2.D3 S2.6
SOFT-TX2: B3.D3 S3.6
SOFT-TX3: B4.D3 S4.6
SOFT-TX4: B5.D3 S5.6
SOFT-TX5: B6.D3 S6.6
TXO: J2.5 S1.2 U2.13
TXO1: J1.5 S2.2 U1.13
TXO2: J13.5 S3.2 U7.13
TXO3: J19.5 S4.2 U10.13
TXO4: J25.5 S5.2 U13.13
TXO5: J31.5 S6.2 U16.13
TXO-LV: U2.2 U3.6 U4.20
TXO-LV1: U1.2 U5.6 U6.20
TXO-LV2: U7.2 U8.6 U9.20
TXO-LV3: U10.2 U11.6 U12.20
TXO-LV4: U13.2 U14.6 U15.20
TXO-LV5: U16.2 U17.6 U18.20
VCC: B1.5V C2.1 C12.1 D2.C JP1.1 U2.14 U4.16 U4.17
VCC1: B2.5V C5.1 C11.1 D4.C JP3.1 U1.14 U6.16 U6.17
VCC2: B3.5V C14.1 C18.1 D6.C JP5.1 U7.14 U9.16 U9.17
VCC3: B4.5V C20.1 C24.1 D8.C JP7.1 U10.14 U12.16 U12.17
VCC4: B5.5V C26.1 C30.1 D10.C JP9.1 U13.14 U15.16 U15.17
VCC5: B6.5V C32.1 C36.1 D12.C JP11.1 U16.14 U18.16 U18.17

## Tracks (layer width: path | path; a pad name or v marks a point on that pad's centre or on a via)
3.3V  (via drill 0.38)
  Top 0.254: 41.78,52.83 43.43,52.83 44.32,51.94 44.32,48.01 42.42,46.1 36.32,46.1 v36.26,46.04 35.82,45.6 U4.10 | 41.78,52.83 U2.8 38.61,51.82 38.1,51.31 33.53,51.31 31.41,49.19 30.99,49.19 | U2.1 v30.99,48.77 30.99,49.19 | C9.1 30.99,49.19 | U3.5 41.78,52.83 | v23.37,44.96 22.1,43.69 22.1,19.81 22.52,19.39 22.52,18.54 | R1.2 22.52,18.54 | R3.2 22.52,18.54
  Bottom 0.254: TP1.P$1 v30.99,48.77 | v23.37,44.96 23.88,45.47 25.27,45.47 25.53,45.21 35.43,45.21 v36.26,46.04
3.3V1  (via drill 0.38)
  Top 0.254: 119.76,52.83 121.41,52.83 122.3,51.94 122.3,48.01 120.4,46.1 114.3,46.1 v114.24,46.04 113.8,45.6 U6.10 | 119.76,52.83 U1.8 116.59,51.82 116.08,51.31 111.51,51.31 109.39,49.19 108.97,49.19 | U1.1 v108.97,48.77 108.97,49.19 | C1.1 108.97,49.19 | U5.5 119.76,52.83 | v101.35,44.96 100.08,43.69 100.08,19.81 100.5,19.39 100.5,18.54 | R4.2 100.5,18.54 | R2.2 100.5,18.54
  Bottom 0.254: TP2.P$1 v108.97,48.77 | v101.35,44.96 101.85,45.47 103.25,45.47 103.51,45.21 113.41,45.21 v114.24,46.04
3.3V2  (via drill 0.38)
  Top 0.254: 197.74,52.83 199.39,52.83 200.28,51.94 200.28,48.01 198.37,46.1 192.28,46.1 v192.22,46.04 191.77,45.6 U9.10 | 197.74,52.83 U7.8 194.56,51.82 194.06,51.31 189.48,51.31 187.36,49.19 186.94,49.19 | U7.1 v186.94,48.77 186.94,49.19 | C13.1 186.94,49.19 | U8.5 197.74,52.83 | v179.32,44.96 178.05,43.69 178.05,19.81 178.47,19.39 178.47,18.54 | R6.2 178.47,18.54 | R5.2 178.47,18.54
  Bottom 0.254: TP3.P$1 v186.94,48.77 | v179.32,44.96 179.83,45.47 181.23,45.47 181.48,45.21 191.39,45.21 v192.22,46.04
3.3V3  (via drill 0.38)
  Top 0.254: 41.78,106.68 43.43,106.68 44.32,105.79 44.32,101.85 42.42,99.95 36.32,99.95 v36.26,99.89 35.82,99.45 U12.10 | 41.78,106.68 U10.8 38.61,105.66 38.1,105.16 33.53,105.16 31.41,103.04 30.99,103.04 | U10.1 v30.99,102.62 30.99,103.04 | C19.1 30.99,103.04 | U11.5 41.78,106.68 | v23.37,98.81 22.1,97.54 22.1,73.66 22.52,73.24 22.52,72.39 | R8.2 22.52,72.39 | R7.2 22.52,72.39
  Bottom 0.254: TP4.P$1 v30.99,102.62 | v23.37,98.81 23.88,99.31 25.27,99.31 25.53,99.06 35.43,99.06 v36.26,99.89
3.3V4  (via drill 0.38)
  Top 0.254: 119.76,106.68 121.41,106.68 122.3,105.79 122.3,101.85 120.4,99.95 114.3,99.95 v114.24,99.89 113.8,99.45 U15.10 | 119.76,106.68 U13.8 116.59,105.66 116.08,105.16 111.51,105.16 109.39,103.04 108.97,103.04 | U13.1 v108.97,102.62 108.97,103.04 | C25.1 108.97,103.04 | U14.5 119.76,106.68 | v101.35,98.81 100.08,97.54 100.08,73.66 100.5,73.24 100.5,72.39 | R10.2 100.5,72.39 | R9.2 100.5,72.39
  Bottom 0.254: TP5.P$1 v108.97,102.62 | v101.35,98.81 101.85,99.31 103.25,99.31 103.51,99.06 113.41,99.06 v114.24,99.89
3.3V5  (via drill 0.38)
  Top 0.254: 197.74,106.68 199.39,106.68 200.28,105.79 200.28,101.85 198.37,99.95 192.28,99.95 v192.22,99.89 191.77,99.45 U18.10 | 197.74,106.68 U16.8 194.56,105.66 194.06,105.16 189.48,105.16 187.36,103.04 186.94,103.04 | U16.1 v186.94,102.62 186.94,103.04 | C31.1 186.94,103.04 | U17.5 197.74,106.68 | v179.32,98.81 178.05,97.54 178.05,73.66 178.47,73.24 178.47,72.39 | R12.2 178.47,72.39 | R11.2 178.47,72.39
  Bottom 0.254: TP6.P$1 v186.94,102.62 | v179.32,98.81 179.83,99.31 181.23,99.31 181.48,99.06 191.39,99.06 v192.22,99.89
ANT1
  Top 0.44: JP4.1 138.94,20.8 SJ1.1 136.14,20.8 128.41,28.53 U6.39
ANT2
  Top 0.44: JP6.1 216.92,20.8 SJ3.1 214.12,20.8 206.39,28.53 U9.39
ANT3
  Top 0.44: JP2.1 60.96,20.8 SJ2.1 58.16,20.8 50.44,28.53 U4.39
ANT4
  Top 0.44: JP8.1 60.96,74.65 SJ4.1 58.16,74.65 50.44,82.38 U12.39
ANT5
  Top 0.44: JP10.1 138.94,74.65 SJ5.1 136.14,74.65 128.41,82.38 U15.39
ANT6
  Top 0.44: JP12.1 216.92,74.65 SJ6.1 214.12,74.65 206.39,82.38 U18.39
ENABLE  (via drill 0.38)
  Top 0.254: J5.1 15.75,28.45 17.02,29.72 17.02,51.31 18.29,52.58 v19.43,52.58 | v34.8,54.48 U2.11
  Bottom 0.254: v34.8,54.48 32.26,51.94 23.37,51.94 22.73,52.58 v19.43,52.58
ENABLE1  (via drill 0.38)
  Top 0.254: J11.1 93.73,28.45 95,29.72 95,51.31 96.27,52.58 v97.41,52.58 | v112.78,54.48 U1.11
  Bottom 0.254: v112.78,54.48 110.24,51.94 101.35,51.94 100.71,52.58 v97.41,52.58
ENABLE2  (via drill 0.38)
  Top 0.254: J17.1 171.7,28.45 172.97,29.72 172.97,51.31 174.24,52.58 v175.39,52.58 | v190.75,54.48 U7.11
  Bottom 0.254: v190.75,54.48 188.21,51.94 179.32,51.94 178.69,52.58 v175.39,52.58
ENABLE3  (via drill 0.38)
  Top 0.254: J23.1 15.75,82.3 17.02,83.57 17.02,105.16 18.29,106.43 v19.43,106.43 | v34.8,108.33 U10.11
  Bottom 0.254: v34.8,108.33 32.26,105.79 23.37,105.79 22.73,106.43 v19.43,106.43
ENABLE4  (via drill 0.38)
  Top 0.254: J29.1 93.73,82.3 95,83.57 95,105.16 96.27,106.43 v97.41,106.43 | v112.78,108.33 U13.11
  Bottom 0.254: v112.78,108.33 110.24,105.79 101.35,105.79 100.71,106.43 v97.41,106.43
ENABLE5  (via drill 0.38)
  Top 0.254: J35.1 171.7,82.3 172.97,83.57 172.97,105.16 174.24,106.43 v175.39,106.43 | v190.75,108.33 U16.11
  Bottom 0.254: v190.75,108.33 188.21,105.79 179.32,105.79 178.69,106.43 v175.39,106.43
ENABLE-LV
  Top 0.254: U3.3 42.73,49.6 42.42,49.91 40.13,49.91 39.75,49.53 36.07,49.53 34.8,48.26 U2.4 34.8,46.23 34.57,46 U4.11
ENABLE-LV1
  Top 0.254: U5.3 120.71,49.6 120.4,49.91 118.11,49.91 117.73,49.53 114.05,49.53 112.78,48.26 U1.4 112.78,46.23 112.55,46 U6.11
ENABLE-LV2
  Top 0.254: U8.3 198.69,49.6 198.37,49.91 196.09,49.91 195.71,49.53 192.02,49.53 190.75,48.26 U7.4 190.75,46.23 190.52,46 U9.11
ENABLE-LV3
  Top 0.254: U11.3 42.73,103.44 42.42,103.76 40.13,103.76 39.75,103.38 36.07,103.38 34.8,102.11 U10.4 34.8,100.08 34.57,99.85 U12.11
ENABLE-LV4
  Top 0.254: U14.3 120.71,103.44 120.4,103.76 118.11,103.76 117.73,103.38 114.05,103.38 112.78,102.11 U13.4 112.78,100.08 112.55,99.85 U15.11
ENABLE-LV5
  Top 0.254: U17.3 198.69,103.44 198.37,103.76 196.09,103.76 195.71,103.38 192.02,103.38 190.75,102.11 U16.4 190.75,100.08 190.52,99.85 U18.11
GND  (via drill 0.38)
  Top 0.254: C3.2 v69.09,24 | v69.09,24 69.09,24.64 | 67.82,24.64 66.83,24.64 66.8,24.61 | v69.09,24 v69.09,25.27 v67.82,25.27 67.82,24.64 | 67.82,24.64 v67.82,24
  Top 0.44: 66.8,24.61 E1.GND@2
  Bottom 0.254: E1.GND@3 65.18,34.7 v64.01,33.53
  other vias: 66.55,25.27 66.55,24 64.01,18.29 64.01,25.91 64.01,29.72 64.01,37.34 64.01,41.15 64.01,44.96 64.01,22.1 65.28,16.38 65.28,24 65.28,27.81 65.28,31.62 65.28,39.24 65.28,46.86 65.28,43.05 61.47,18.29 61.47,25.91 61.47,33.53 61.47,41.15 61.47,48.77 61.47,44.96 61.47,22.1 62.74,24 62.74,27.81 62.74,31.62 62.74,35.43 62.74,39.24 62.74,46.86 62.74,43.05 58.93,18.29 58.93,33.53 58.93,41.15 58.93,48.77 58.93,44.96 60.2,16.38 60.2,35.43 60.2,46.86 60.2,43.05 60.2,50.67 56.39,18.29 56.39,25.91 56.39,29.72 56.39,33.53 56.39,37.34 56.39,41.15 56.39,44.96 57.66,16.38 57.66,24 57.66,31.62 57.66,35.43 57.66,39.24 57.66,46.86 57.66,43.05 57.66,20.19 53.85,18.29 53.85,29.72 53.85,33.53 53.85,37.34 53.85,41.15 53.85,44.96 53.85,22.1 55.12,16.38 55.12,27.81 55.12,31.62 55.12,35.43 55.12,39.24 55.12,43.05 55.12,20.19 51.31,18.29 51.31,25.91 51.31,29.72 51.31,33.53 51.31,37.34 51.31,41.15 51.31,44.96 51.31,22.1 52.58,16.38 52.58,24 52.58,31.62 52.58,35.43 52.58,39.24 52.58,43.05 52.58,20.19 51.56,50.8 39.88,16.38 48.77,18.29 50.04,16.38 46.23,18.29 47.5,16.38 43.69,18.29 44.96,16.38 41.15,18.29 42.42,16.38 46.23,14.48 47.5,12.57 43.69,14.48 44.96,12.57 41.15,14.48 42.42,12.57 39.88,12.57 50.04,20.19 47.5,20.19 44.96,20.19 42.42,20.19 39.88,20.19 56.39,14.48 53.85,14.48 55.12,12.57 51.31,14.48 52.58,12.57 48.77,14.48 50.04,12.57 14.48,12.57 24.64,21.46 18.29,22.1 38.61,18.29 27.18,16.38 37.34,16.38 34.8,16.38 32.26,16.38 29.72,16.38 33.53,14.48 30.99,14.48 28.45,14.48 37.34,20.19 32.26,20.19 29.72,20.19 38.61,14.48 37.34,12.57 22.1,8.76 19.56,8.76 17.02,8.76 14.48,8.76 20.83,10.67 18.29,10.67 15.75,10.67 10.67,22.1 13.21,14.48 10.67,14.48 39.88,47.5 43.69,45.85 46.23,45.85 48.77,45.85 25.65,52.96 24.64,52.96 23.62,52.96 28.19,52.96 29.46,52.96 18.29,14.48 23.37,21.46 24.77,44.7 24.77,43.81 55.12,46.86 23.37,10.67 62.74,16.38 46.23,10.67 44.96,37.97 43.69,37.97 43.69,36.7 44.96,36.7 44.96,35.43 43.69,35.43 43.69,34.16 44.96,34.16 44.96,32.89 43.69,32.89 43.69,31.62 44.96,31.62 44.96,30.35 43.69,30.35 43.69,29.08 44.96,29.08 44.96,27.81 43.69,27.81 36.32,33.53 37.59,33.53 37.59,32.26 36.32,32.26 36.32,30.99 37.59,30.99 37.59,29.72 36.32,29.72 36.32,28.45 37.59,28.45 37.59,27.18 36.32,27.18 38.86,33.53 40.13,33.53 40.13,32.26 38.86,32.26 38.86,30.99 40.13,30.99 40.13,29.72 38.86,29.72 38.86,28.45 40.13,28.45 40.13,27.18 38.86,27.18 33.78,33.53 35.05,33.53 35.05,32.26 33.78,32.26 33.78,30.99 35.05,30.99 35.05,29.72 33.78,29.72 33.78,28.45 35.05,28.45 35.05,27.18 33.78,27.18 47.5,32.89 48.77,32.89 47.5,37.97 47.5,36.7 47.5,35.43 47.5,34.16 48.77,37.97 48.77,36.7 48.77,35.43 48.77,34.16 46.23,37.97 46.23,36.7 46.23,35.43 46.23,34.16 47.5,41.78 47.5,40.51 47.5,39.24 48.77,39.24 48.77,40.51 48.77,41.78 19.56,15.75 19.56,20.83 10.67,37.34 11.94,37.34 13.21,37.34 14.48,37.34 10.67,34.8 11.94,34.8 13.21,34.8 14.48,34.8 36.07,14.48 20.83,18.29 25.91,14.48 23.37,14.48 20.83,14.48
  pour Top (isolate 0.305, rank 6, no thermals): 50.04,60.2 50.04,48.77 20.83,48.77 20.83,17.02 50.04,17.02 50.04,6.86 58.93,6.86 58.93,15.75 66.55,15.75 66.55,51.31 58.93,51.31 58.93,60.2
  pour Bottom (isolate 0.305, rank 6, no thermals): 50.04,60.2 50.04,6.86 58.93,6.86 58.93,15.75 66.55,15.75 66.55,51.31 58.93,51.31 58.93,60.2
  pour Top (isolate 0.305): 50.04,6.86 50.04,20.83 20.83,20.83 20.83,46.23 50.04,46.23 50.04,60.2 6.86,60.2 6.86,6.86
  pour Bottom (isolate 0.305): 50.04,6.86 50.04,60.2 6.86,60.2 6.86,6.86
GND1  (via drill 0.38)
  Top 0.254: C6.2 v147.07,24 | v147.07,24 147.07,24.64 | 145.8,24.64 144.81,24.64 144.78,24.61 | v147.07,24 v147.07,25.27 v145.8,25.27 145.8,24.64 | 145.8,24.64 v145.8,24
  Top 0.44: 144.78,24.61 E2.GND@2
  Bottom 0.254: E2.GND@3 143.16,34.7 v141.99,33.53
  other vias: 144.53,25.27 144.53,24 141.99,18.29 141.99,25.91 141.99,29.72 141.99,37.34 141.99,41.15 141.99,44.96 141.99,22.1 143.26,16.38 143.26,24 143.26,27.81 143.26,31.62 143.26,39.24 143.26,46.86 143.26,43.05 139.45,18.29 139.45,25.91 139.45,33.53 139.45,41.15 139.45,48.77 139.45,44.96 139.45,22.1 140.72,24 140.72,27.81 140.72,31.62 140.72,35.43 140.72,39.24 140.72,46.86 140.72,43.05 136.91,18.29 136.91,33.53 136.91,41.15 136.91,48.77 136.91,44.96 138.18,16.38 138.18,35.43 138.18,46.86 138.18,43.05 138.18,50.67 134.37,18.29 134.37,25.91 134.37,29.72 134.37,33.53 134.37,37.34 134.37,41.15 134.37,44.96 135.64,16.38 135.64,24 135.64,31.62 135.64,35.43 135.64,39.24 135.64,46.86 135.64,43.05 135.64,20.19 131.83,18.29 131.83,29.72 131.83,33.53 131.83,37.34 131.83,41.15 131.83,44.96 131.83,22.1 133.1,16.38 133.1,27.81 133.1,31.62 133.1,35.43 133.1,39.24 133.1,43.05 133.1,20.19 129.29,18.29 129.29,25.91 129.29,29.72 129.29,33.53 129.29,37.34 129.29,41.15 129.29,44.96 129.29,22.1 130.56,16.38 130.56,24 130.56,31.62 130.56,35.43 130.56,39.24 130.56,43.05 130.56,20.19 129.54,50.8 117.86,16.38 126.75,18.29 128.02,16.38 124.21,18.29 125.48,16.38 121.67,18.29 122.94,16.38 119.13,18.29 120.4,16.38 124.21,14.48 125.48,12.57 121.67,14.48 122.94,12.57 119.13,14.48 120.4,12.57 117.86,12.57 128.02,20.19 125.48,20.19 122.94,20.19 120.4,20.19 117.86,20.19 134.37,14.48 131.83,14.48 133.1,12.57 129.29,14.48 130.56,12.57 126.75,14.48 128.02,12.57 92.46,12.57 102.62,21.46 96.27,22.1 116.59,18.29 105.16,16.38 115.32,16.38 112.78,16.38 110.24,16.38 107.7,16.38 111.51,14.48 108.97,14.48 106.43,14.48 115.32,20.19 110.24,20.19 107.7,20.19 116.59,14.48 115.32,12.57 100.08,8.76 97.54,8.76 95,8.76 92.46,8.76 98.81,10.67 96.27,10.67 93.73,10.67 88.65,22.1 91.19,14.48 88.65,14.48 117.86,47.5 121.67,45.85 124.21,45.85 126.75,45.85 103.63,52.96 102.62,52.96 101.6,52.96 106.17,52.96 107.44,52.96 96.27,14.48 101.35,21.46 102.74,44.7 102.74,43.81 133.1,46.86 101.35,10.67 140.72,16.38 124.21,10.67 122.94,37.97 121.67,37.97 121.67,36.7 122.94,36.7 122.94,35.43 121.67,35.43 121.67,34.16 122.94,34.16 122.94,32.89 121.67,32.89 121.67,31.62 122.94,31.62 122.94,30.35 121.67,30.35 121.67,29.08 122.94,29.08 122.94,27.81 121.67,27.81 114.3,33.53 115.57,33.53 115.57,32.26 114.3,32.26 114.3,30.99 115.57,30.99 115.57,29.72 114.3,29.72 114.3,28.45 115.57,28.45 115.57,27.18 114.3,27.18 116.84,33.53 118.11,33.53 118.11,32.26 116.84,32.26 116.84,30.99 118.11,30.99 118.11,29.72 116.84,29.72 116.84,28.45 118.11,28.45 118.11,27.18 116.84,27.18 111.76,33.53 113.03,33.53 113.03,32.26 111.76,32.26 111.76,30.99 113.03,30.99 113.03,29.72 111.76,29.72 111.76,28.45 113.03,28.45 113.03,27.18 111.76,27.18 125.48,32.89 126.75,32.89 125.48,37.97 125.48,36.7 125.48,35.43 125.48,34.16 126.75,37.97 126.75,36.7 126.75,35.43 126.75,34.16 124.21,37.97 124.21,36.7 124.21,35.43 124.21,34.16 125.48,41.78 125.48,40.51 125.48,39.24 126.75,39.24 126.75,40.51 126.75,41.78 97.54,15.75 97.54,20.83 88.65,37.34 89.92,37.34 91.19,37.34 92.46,37.34 88.65,34.8 89.92,34.8 91.19,34.8 92.46,34.8 114.05,14.48 98.81,18.29 103.89,14.48 101.35,14.48 98.81,14.48
  pour Top (isolate 0.305, rank 6, no thermals): 128.02,60.2 128.02,48.77 98.81,48.77 98.81,17.02 128.02,17.02 128.02,6.86 136.91,6.86 136.91,15.75 144.53,15.75 144.53,51.31 136.91,51.31 136.91,60.2
  pour Bottom (isolate 0.305, rank 6, no thermals): 128.02,60.2 128.02,6.86 136.91,6.86 136.91,15.75 144.53,15.75 144.53,51.31 136.91,51.31 136.91,60.2
  pour Top (isolate 0.305): 128.02,6.86 128.02,20.83 98.81,20.83 98.81,46.23 128.02,46.23 128.02,60.2 84.84,60.2 84.84,6.86
  pour Bottom (isolate 0.305): 128.02,6.86 128.02,60.2 84.84,60.2 84.84,6.86
GND2  (via drill 0.38)
  Top 0.254: C15.2 v225.04,24 | v225.04,24 225.04,24.64 | 223.77,24.64 222.79,24.64 222.76,24.61 | v225.04,24 v225.04,25.27 v223.77,25.27 223.77,24.64 | 223.77,24.64 v223.77,24
  Top 0.44: 222.76,24.61 E3.GND@2
  Bottom 0.254: E3.GND@3 221.14,34.7 v219.96,33.53
  other vias: 222.5,25.27 222.5,24 219.96,18.29 219.96,25.91 219.96,29.72 219.96,37.34 219.96,41.15 219.96,44.96 219.96,22.1 221.23,16.38 221.23,24 221.23,27.81 221.23,31.62 221.23,39.24 221.23,46.86 221.23,43.05 217.42,18.29 217.42,25.91 217.42,33.53 217.42,41.15 217.42,48.77 217.42,44.96 217.42,22.1 218.69,24 218.69,27.81 218.69,31.62 218.69,35.43 218.69,39.24 218.69,46.86 218.69,43.05 214.88,18.29 214.88,33.53 214.88,41.15 214.88,48.77 214.88,44.96 216.15,16.38 216.15,35.43 216.15,46.86 216.15,43.05 216.15,50.67 212.34,18.29 212.34,25.91 212.34,29.72 212.34,33.53 212.34,37.34 212.34,41.15 212.34,44.96 213.61,16.38 213.61,24 213.61,31.62 213.61,35.43 213.61,39.24 213.61,46.86 213.61,43.05 213.61,20.19 209.8,18.29 209.8,29.72 209.8,33.53 209.8,37.34 209.8,41.15 209.8,44.96 209.8,22.1 211.07,16.38 211.07,27.81 211.07,31.62 211.07,35.43 211.07,39.24 211.07,43.05 211.07,20.19 207.26,18.29 207.26,25.91 207.26,29.72 207.26,33.53 207.26,37.34 207.26,41.15 207.26,44.96 207.26,22.1 208.53,16.38 208.53,24 208.53,31.62 208.53,35.43 208.53,39.24 208.53,43.05 208.53,20.19 207.52,50.8 195.83,16.38 204.72,18.29 205.99,16.38 202.18,18.29 203.45,16.38 199.64,18.29 200.91,16.38 197.1,18.29 198.37,16.38 202.18,14.48 203.45,12.57 199.64,14.48 200.91,12.57 197.1,14.48 198.37,12.57 195.83,12.57 205.99,20.19 203.45,20.19 200.91,20.19 198.37,20.19 195.83,20.19 212.34,14.48 209.8,14.48 211.07,12.57 207.26,14.48 208.53,12.57 204.72,14.48 205.99,12.57 170.43,12.57 180.59,21.46 174.24,22.1 194.56,18.29 183.13,16.38 193.29,16.38 190.75,16.38 188.21,16.38 185.67,16.38 189.48,14.48 186.94,14.48 184.4,14.48 193.29,20.19 188.21,20.19 185.67,20.19 194.56,14.48 193.29,12.57 178.05,8.76 175.51,8.76 172.97,8.76 170.43,8.76 176.78,10.67 174.24,10.67 171.7,10.67 166.62,22.1 169.16,14.48 166.62,14.48 195.83,47.5 199.64,45.85 202.18,45.85 204.72,45.85 181.61,52.96 180.59,52.96 179.58,52.96 184.15,52.96 185.42,52.96 174.24,14.48 179.32,21.46 180.72,44.7 180.72,43.81 211.07,46.86 179.32,10.67 218.69,16.38 202.18,10.67 200.91,37.97 199.64,37.97 199.64,36.7 200.91,36.7 200.91,35.43 199.64,35.43 199.64,34.16 200.91,34.16 200.91,32.89 199.64,32.89 199.64,31.62 200.91,31.62 200.91,30.35 199.64,30.35 199.64,29.08 200.91,29.08 200.91,27.81 199.64,27.81 192.28,33.53 193.55,33.53 193.55,32.26 192.28,32.26 192.28,30.99 193.55,30.99 193.55,29.72 192.28,29.72 192.28,28.45 193.55,28.45 193.55,27.18 192.28,27.18 194.82,33.53 196.09,33.53 196.09,32.26 194.82,32.26 194.82,30.99 196.09,30.99 196.09,29.72 194.82,29.72 194.82,28.45 196.09,28.45 196.09,27.18 194.82,27.18 189.74,33.53 191.01,33.53 191.01,32.26 189.74,32.26 189.74,30.99 191.01,30.99 191.01,29.72 189.74,29.72 189.74,28.45 191.01,28.45 191.01,27.18 189.74,27.18 203.45,32.89 204.72,32.89 203.45,37.97 203.45,36.7 203.45,35.43 203.45,34.16 204.72,37.97 204.72,36.7 204.72,35.43 204.72,34.16 202.18,37.97 202.18,36.7 202.18,35.43 202.18,34.16 203.45,41.78 203.45,40.51 203.45,39.24 204.72,39.24 204.72,40.51 204.72,41.78 175.51,15.75 175.51,20.83 166.62,37.34 167.89,37.34 169.16,37.34 170.43,37.34 166.62,34.8 167.89,34.8 169.16,34.8 170.43,34.8 192.02,14.48 176.78,18.29 181.86,14.48 179.32,14.48 176.78,14.48
  pour Top (isolate 0.305, rank 6, no thermals): 205.99,60.2 205.99,48.77 176.78,48.77 176.78,17.02 205.99,17.02 205.99,6.86 214.88,6.86 214.88,15.75 222.5,15.75 222.5,51.31 214.88,51.31 214.88,60.2
  pour Bottom (isolate 0.305, rank 6, no thermals): 205.99,60.2 205.99,6.86 214.88,6.86 214.88,15.75 222.5,15.75 222.5,51.31 214.88,51.31 214.88,60.2
  pour Top (isolate 0.305): 205.99,6.86 205.99,20.83 176.78,20.83 176.78,46.23 205.99,46.23 205.99,60.2 162.81,60.2 162.81,6.86
  pour Bottom (isolate 0.305): 205.99,6.86 205.99,60.2 162.81,60.2 162.81,6.86
GND3  (via drill 0.38)
  Top 0.254: C21.2 v69.09,77.85 | v69.09,77.85 69.09,78.49 | 67.82,78.49 66.83,78.49 66.8,78.46 | v69.09,77.85 v69.09,79.12 v67.82,79.12 67.82,78.49 | 67.82,78.49 v67.82,77.85
  Top 0.44: 66.8,78.46 E4.GND@2
  Bottom 0.254: E4.GND@3 65.18,88.55 v64.01,87.38
  other vias: 66.55,79.12 66.55,77.85 64.01,72.14 64.01,79.76 64.01,83.57 64.01,91.19 64.01,95 64.01,98.81 64.01,75.95 65.28,70.23 65.28,77.85 65.28,81.66 65.28,85.47 65.28,93.09 65.28,100.71 65.28,96.9 61.47,72.14 61.47,79.76 61.47,87.38 61.47,95 61.47,102.62 61.47,98.81 61.47,75.95 62.74,77.85 62.74,81.66 62.74,85.47 62.74,89.28 62.74,93.09 62.74,100.71 62.74,96.9 58.93,72.14 58.93,87.38 58.93,95 58.93,102.62 58.93,98.81 60.2,70.23 60.2,89.28 60.2,100.71 60.2,96.9 60.2,104.52 56.39,72.14 56.39,79.76 56.39,83.57 56.39,87.38 56.39,91.19 56.39,95 56.39,98.81 57.66,70.23 57.66,77.85 57.66,85.47 57.66,89.28 57.66,93.09 57.66,100.71 57.66,96.9 57.66,74.04 53.85,72.14 53.85,83.57 53.85,87.38 53.85,91.19 53.85,95 53.85,98.81 53.85,75.95 55.12,70.23 55.12,81.66 55.12,85.47 55.12,89.28 55.12,93.09 55.12,96.9 55.12,74.04 51.31,72.14 51.31,79.76 51.31,83.57 51.31,87.38 51.31,91.19 51.31,95 51.31,98.81 51.31,75.95 52.58,70.23 52.58,77.85 52.58,85.47 52.58,89.28 52.58,93.09 52.58,96.9 52.58,74.04 51.56,104.65 39.88,70.23 48.77,72.14 50.04,70.23 46.23,72.14 47.5,70.23 43.69,72.14 44.96,70.23 41.15,72.14 42.42,70.23 46.23,68.33 47.5,66.42 43.69,68.33 44.96,66.42 41.15,68.33 42.42,66.42 39.88,66.42 50.04,74.04 47.5,74.04 44.96,74.04 42.42,74.04 39.88,74.04 56.39,68.33 53.85,68.33 55.12,66.42 51.31,68.33 52.58,66.42 48.77,68.33 50.04,66.42 14.48,66.42 24.64,75.31 18.29,75.95 38.61,72.14 27.18,70.23 37.34,70.23 34.8,70.23 32.26,70.23 29.72,70.23 33.53,68.33 30.99,68.33 28.45,68.33 37.34,74.04 32.26,74.04 29.72,74.04 38.61,68.33 37.34,66.42 22.1,62.61 19.56,62.61 17.02,62.61 14.48,62.61 20.83,64.52 18.29,64.52 15.75,64.52 10.67,75.95 13.21,68.33 10.67,68.33 39.88,101.35 43.69,99.7 46.23,99.7 48.77,99.7 25.65,106.81 24.64,106.81 23.62,106.81 28.19,106.81 29.46,106.81 18.29,68.33 23.37,75.31 24.77,98.55 24.77,97.66 55.12,100.71 23.37,64.52 62.74,70.23 46.23,64.52 44.96,91.82 43.69,91.82 43.69,90.55 44.96,90.55 44.96,89.28 43.69,89.28 43.69,88.01 44.96,88.01 44.96,86.74 43.69,86.74 43.69,85.47 44.96,85.47 44.96,84.2 43.69,84.2 43.69,82.93 44.96,82.93 44.96,81.66 43.69,81.66 36.32,87.38 37.59,87.38 37.59,86.11 36.32,86.11 36.32,84.84 37.59,84.84 37.59,83.57 36.32,83.57 36.32,82.3 37.59,82.3 37.59,81.03 36.32,81.03 38.86,87.38 40.13,87.38 40.13,86.11 38.86,86.11 38.86,84.84 40.13,84.84 40.13,83.57 38.86,83.57 38.86,82.3 40.13,82.3 40.13,81.03 38.86,81.03 33.78,87.38 35.05,87.38 35.05,86.11 33.78,86.11 33.78,84.84 35.05,84.84 35.05,83.57 33.78,83.57 33.78,82.3 35.05,82.3 35.05,81.03 33.78,81.03 47.5,86.74 48.77,86.74 47.5,91.82 47.5,90.55 47.5,89.28 47.5,88.01 48.77,91.82 48.77,90.55 48.77,89.28 48.77,88.01 46.23,91.82 46.23,90.55 46.23,89.28 46.23,88.01 47.5,95.63 47.5,94.36 47.5,93.09 48.77,93.09 48.77,94.36 48.77,95.63 19.56,69.6 19.56,74.68 10.67,91.19 11.94,91.19 13.21,91.19 14.48,91.19 10.67,88.65 11.94,88.65 13.21,88.65 14.48,88.65 36.07,68.33 20.83,72.14 25.91,68.33 23.37,68.33 20.83,68.33
  pour Top (isolate 0.305, rank 6, no thermals): 50.04,114.05 50.04,102.62 20.83,102.62 20.83,70.87 50.04,70.87 50.04,60.71 58.93,60.71 58.93,69.6 66.55,69.6 66.55,105.16 58.93,105.16 58.93,114.05
  pour Bottom (isolate 0.305, rank 6, no thermals): 50.04,114.05 50.04,60.71 58.93,60.71 58.93,69.6 66.55,69.6 66.55,105.16 58.93,105.16 58.93,114.05
  pour Top (isolate 0.305): 50.04,60.71 50.04,74.68 20.83,74.68 20.83,100.08 50.04,100.08 50.04,114.05 6.86,114.05 6.86,60.71
  pour Bottom (isolate 0.305): 50.04,60.71 50.04,114.05 6.86,114.05 6.86,60.71
GND4  (via drill 0.38)
  Top 0.254: C27.2 v147.07,77.85 | v147.07,77.85 147.07,78.49 | 145.8,78.49 144.81,78.49 144.78,78.46 | v147.07,77.85 v147.07,79.12 v145.8,79.12 145.8,78.49 | 145.8,78.49 v145.8,77.85
  Top 0.44: 144.78,78.46 E5.GND@2
  Bottom 0.254: E5.GND@3 143.16,88.55 v141.99,87.38
  other vias: 144.53,79.12 144.53,77.85 141.99,72.14 141.99,79.76 141.99,83.57 141.99,91.19 141.99,95 141.99,98.81 141.99,75.95 143.26,70.23 143.26,77.85 143.26,81.66 143.26,85.47 143.26,93.09 143.26,100.71 143.26,96.9 139.45,72.14 139.45,79.76 139.45,87.38 139.45,95 139.45,102.62 139.45,98.81 139.45,75.95 140.72,77.85 140.72,81.66 140.72,85.47 140.72,89.28 140.72,93.09 140.72,100.71 140.72,96.9 136.91,72.14 136.91,87.38 136.91,95 136.91,102.62 136.91,98.81 138.18,70.23 138.18,89.28 138.18,100.71 138.18,96.9 138.18,104.52 134.37,72.14 134.37,79.76 134.37,83.57 134.37,87.38 134.37,91.19 134.37,95 134.37,98.81 135.64,70.23 135.64,77.85 135.64,85.47 135.64,89.28 135.64,93.09 135.64,100.71 135.64,96.9 135.64,74.04 131.83,72.14 131.83,83.57 131.83,87.38 131.83,91.19 131.83,95 131.83,98.81 131.83,75.95 133.1,70.23 133.1,81.66 133.1,85.47 133.1,89.28 133.1,93.09 133.1,96.9 133.1,74.04 129.29,72.14 129.29,79.76 129.29,83.57 129.29,87.38 129.29,91.19 129.29,95 129.29,98.81 129.29,75.95 130.56,70.23 130.56,77.85 130.56,85.47 130.56,89.28 130.56,93.09 130.56,96.9 130.56,74.04 129.54,104.65 117.86,70.23 126.75,72.14 128.02,70.23 124.21,72.14 125.48,70.23 121.67,72.14 122.94,70.23 119.13,72.14 120.4,70.23 124.21,68.33 125.48,66.42 121.67,68.33 122.94,66.42 119.13,68.33 120.4,66.42 117.86,66.42 128.02,74.04 125.48,74.04 122.94,74.04 120.4,74.04 117.86,74.04 134.37,68.33 131.83,68.33 133.1,66.42 129.29,68.33 130.56,66.42 126.75,68.33 128.02,66.42 92.46,66.42 102.62,75.31 96.27,75.95 116.59,72.14 105.16,70.23 115.32,70.23 112.78,70.23 110.24,70.23 107.7,70.23 111.51,68.33 108.97,68.33 106.43,68.33 115.32,74.04 110.24,74.04 107.7,74.04 116.59,68.33 115.32,66.42 100.08,62.61 97.54,62.61 95,62.61 92.46,62.61 98.81,64.52 96.27,64.52 93.73,64.52 88.65,75.95 91.19,68.33 88.65,68.33 117.86,101.35 121.67,99.7 124.21,99.7 126.75,99.7 103.63,106.81 102.62,106.81 101.6,106.81 106.17,106.81 107.44,106.81 96.27,68.33 101.35,75.31 102.74,98.55 102.74,97.66 133.1,100.71 101.35,64.52 140.72,70.23 124.21,64.52 122.94,91.82 121.67,91.82 121.67,90.55 122.94,90.55 122.94,89.28 121.67,89.28 121.67,88.01 122.94,88.01 122.94,86.74 121.67,86.74 121.67,85.47 122.94,85.47 122.94,84.2 121.67,84.2 121.67,82.93 122.94,82.93 122.94,81.66 121.67,81.66 114.3,87.38 115.57,87.38 115.57,86.11 114.3,86.11 114.3,84.84 115.57,84.84 115.57,83.57 114.3,83.57 114.3,82.3 115.57,82.3 115.57,81.03 114.3,81.03 116.84,87.38 118.11,87.38 118.11,86.11 116.84,86.11 116.84,84.84 118.11,84.84 118.11,83.57 116.84,83.57 116.84,82.3 118.11,82.3 118.11,81.03 116.84,81.03 111.76,87.38 113.03,87.38 113.03,86.11 111.76,86.11 111.76,84.84 113.03,84.84 113.03,83.57 111.76,83.57 111.76,82.3 113.03,82.3 113.03,81.03 111.76,81.03 125.48,86.74 126.75,86.74 125.48,91.82 125.48,90.55 125.48,89.28 125.48,88.01 126.75,91.82 126.75,90.55 126.75,89.28 126.75,88.01 124.21,91.82 124.21,90.55 124.21,89.28 124.21,88.01 125.48,95.63 125.48,94.36 125.48,93.09 126.75,93.09 126.75,94.36 126.75,95.63 97.54,69.6 97.54,74.68 88.65,91.19 89.92,91.19 91.19,91.19 92.46,91.19 88.65,88.65 89.92,88.65 91.19,88.65 92.46,88.65 114.05,68.33 98.81,72.14 103.89,68.33 101.35,68.33 98.81,68.33
  pour Top (isolate 0.305, rank 6, no thermals): 128.02,114.05 128.02,102.62 98.81,102.62 98.81,70.87 128.02,70.87 128.02,60.71 136.91,60.71 136.91,69.6 144.53,69.6 144.53,105.16 136.91,105.16 136.91,114.05
  pour Bottom (isolate 0.305, rank 6, no thermals): 128.02,114.05 128.02,60.71 136.91,60.71 136.91,69.6 144.53,69.6 144.53,105.16 136.91,105.16 136.91,114.05
  pour Top (isolate 0.305): 128.02,60.71 128.02,74.68 98.81,74.68 98.81,100.08 128.02,100.08 128.02,114.05 84.84,114.05 84.84,60.71
  pour Bottom (isolate 0.305): 128.02,60.71 128.02,114.05 84.84,114.05 84.84,60.71
GND5  (via drill 0.38)
  Top 0.254: C33.2 v225.04,77.85 | v225.04,77.85 225.04,78.49 | 223.77,78.49 222.79,78.49 222.76,78.46 | v225.04,77.85 v225.04,79.12 v223.77,79.12 223.77,78.49 | 223.77,78.49 v223.77,77.85
  Top 0.44: 222.76,78.46 E6.GND@2
  Bottom 0.254: E6.GND@3 221.14,88.55 v219.96,87.38